# Altium PCB All-in-One.PcbDoc
Units mil, origin at the board's own origin, x right, y up, seen from the top; angles counter-clockwise.
Board outline 5050 x 8260 mil, 2 copper layers (Top Layer, Bottom Layer); 48 components, 29 nets, 108 pads, 0 vias.
Unrouted connection lines stored in the file: 35.
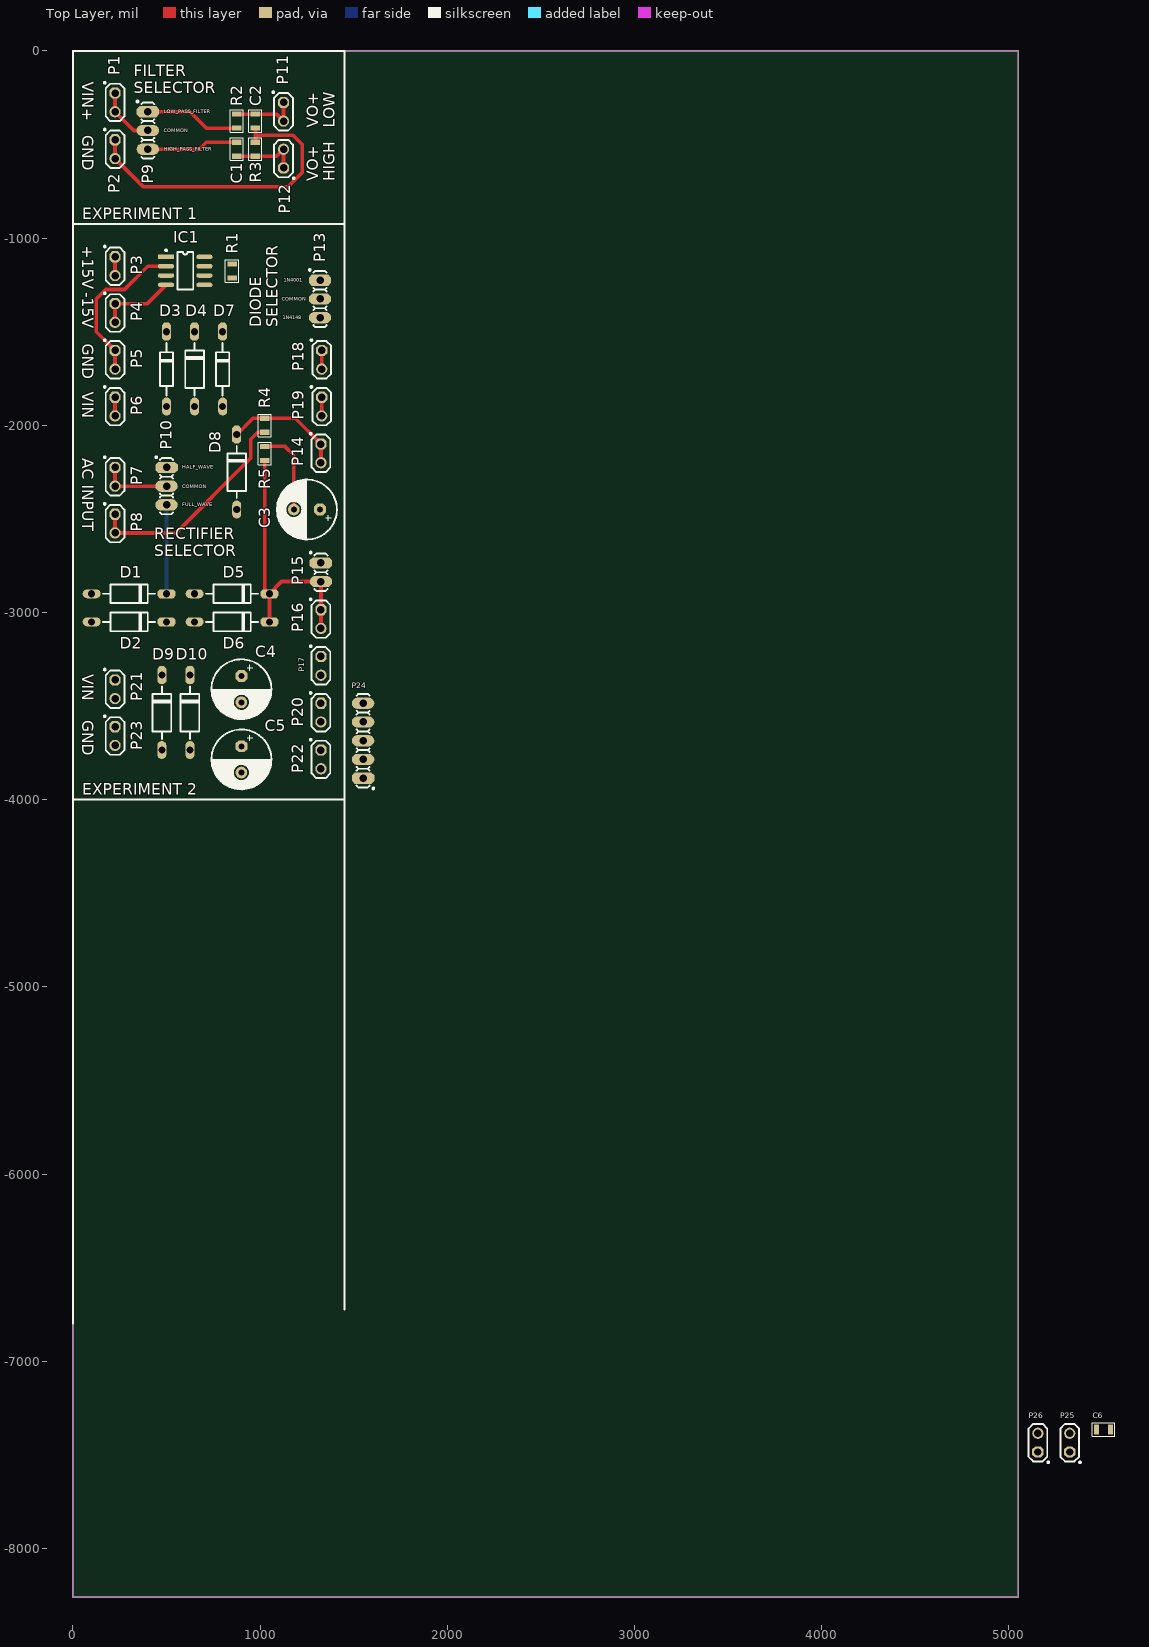
[diagram p0: Top Layer view]
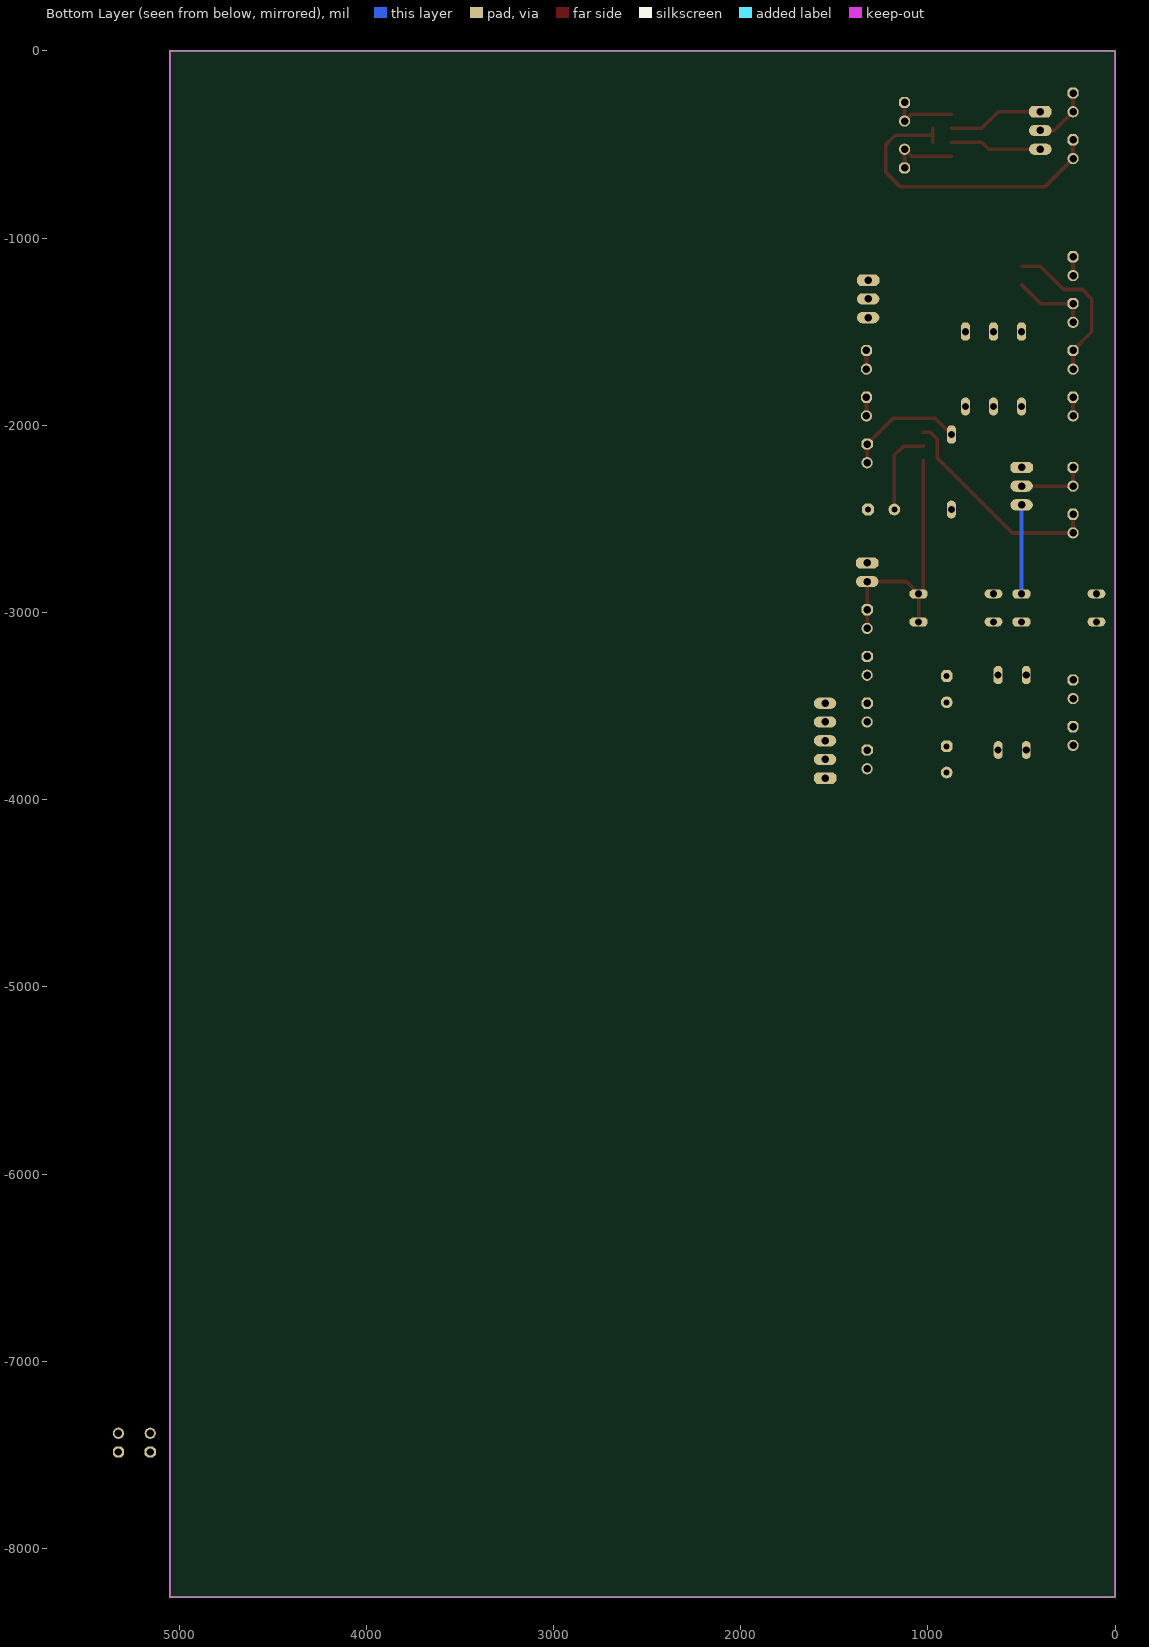
[diagram p1: Bottom Layer view, seen from below]

## Layer stack, top to bottom
Top Solder: solder mask 0.4, Solder Resist, Dk 3.5
Top Layer: signal copper 1.4
Dielectric 1: dielectric 12.6, FR-4, Dk 4.8
Bottom Layer: signal copper 1.4
Bottom Solder: solder mask 0.4, Solder Resist, Dk 3.5

## Board outline
0,-8260 0,0 5050,0 5050,-8260

## Design rules (kind name [scope] priority, off if disabled: settings)
Clearance [All] p1: gap=10
PolygonConnect [All] p1: connectstyle=Relief reliefconductorwidth=10 reliefentries=4 polygonreliefangle="90 Angle" airgapwidth=10
RoutingVias [All] p1: holewidth=28 width=50 viastyle="Through Hole" minholewidth=28 minwidth=50 maxholewidth=28 maxwidth=50
SolderMaskExpansion [All] p1: expansion=4
Width [All] p1: maxlimit=30 minlimit=12 preferedwidth=20 minimp=50.000000 maximp=50.000000 favimp=50.000000
30 further rules are at their usual default settings.

## Classes and differential pairs
component class "Experiment 2": C3 C4 C5 D1 D2 D3 D4 D5 D6 D7 D8 D9 D10 IC1 P3 P4 P5 P6 P7 P8 P10 P13 P14 P15 P16 P17 P18 P19 P20 P21 P22 P23 P24 R1 R4 R5
component class "Experiment 1": C1 C2 P1 P2 P9 P11 P12 R2 R3
component class "Experiment 3": C6 P25 P26

## Components (designator, comment, footprint, x,y, rotation, side; value= is the part's Value field where it differs from the comment)
C1 "100pF" C0805 875,-525 r270 top (schematic designator C2)
C2 "100pF" C0805 975,-375 r270 top (schematic designator C1)
C3 "100uF/50V" C-3.5x8 1250,-2450 r180 top
C4 "100uF/50V" C-3.5x8 900,-3410 r270 top
C5 "100uF/50V" C-3.5x8 900,-3785 r270 top
C6 "1uF" C0805 5505,-7365 r0 top
D1 "1N4001" DO41-10 300,-2900 r0 top (schematic designator D5)
D2 "1N4001" DO41-10 300,-3050 r0 top (schematic designator D7)
D3 "1N4148" DO35-10 500,-1700 r90 top (schematic designator D1)
D4 "1N4001" DO41-10 650,-1700 r90 top (schematic designator D3)
D5 "1N4001" DO41-10 850,-2900 r0 top (schematic designator D6)
D6 "1N4001" DO41-10 850,-3050 r0 top (schematic designator D8)
D7 "1N4148" DO35-10 800,-1700 r90 top (schematic designator D2)
D8 "1N4001" DO41-10 875,-2250 r90 top (schematic designator D4)
D9 "1N4001" DO41-10 475,-3535 r90 top
D10 "1N4001" DO41-10 625,-3535 r90 top
IC1 "UA741CDT" SOIC-8 600,-1175 r0 top
P1 "VIN" "PINHD-1X02 ONCE" 225,-275 r270 top net-tie (schematic designator P2)
P2 "GND" "PINHD-1X02 ONCE" 225,-525 r270 top net-tie (schematic designator P4)
P3 "+15V" "PINHD-1X02 ONCE" 225,-1150 r270 top net-tie (schematic designator P7)
P4 "-15V" "PINHD-1X02 ONCE" 225,-1400 r270 top net-tie (schematic designator P9)
P5 "GND" "PINHD-1X02 ONCE" 225,-1650 r270 top net-tie (schematic designator P11)
P6 "VIN" "PINHD-1X02 ONCE" 225,-1900 r270 top net-tie
P7 "+AC" "PINHD-1X02 ONCE" 225,-2275 r270 top net-tie (schematic designator P16)
P8 "-AC" "PINHD-1X02 ONCE" 225,-2525 r270 top net-tie (schematic designator P17)
P9 "SEL_FILTER" PINHD-1X03 400,-425 r270 top (schematic designator P7)
P10 "SEL_RECTIF" PINHD-1X03 500,-2325 r270 top (schematic designator P13)
P11 "VO_LOW" "PINHD-1X02 ONCE" 1125,-325 r270 top net-tie (schematic designator P8)
P12 "VO_HIGH" "PINHD-1X02 ONCE" 1125,-575 r90 top net-tie (schematic designator P9)
P13 "SEL_DIODE" PINHD-1X03 1320,-1325 r270 top (schematic designator P10)
P14 "+AC" "PINHD-1X02 ONCE" 1325,-2150 r270 top net-tie (schematic designator P15)
P15 "ENABLE_CAPAC" PINHD-1X02 1325,-2785 r270 top (schematic designator P14)
P16 "VCC" "PINHD-1X02 ONCE" 1325,-3035 r270 top net-tie (schematic designator P18)
P17 "GND" "PINHD-1X02 ONCE" 1325,-3285 r270 top net-tie (schematic designator P19)
P18 "VR" "PINHD-1X02 ONCE" 1329,-1650 r270 top net-tie (schematic designator P11)
P19 "VD" "PINHD-1X02 ONCE" 1329,-1900 r270 top net-tie (schematic designator P12)
P20 "V+_D" "PINHD-1X02 ONCE" 1325,-3535 r270 top
P21 "VIN_D" "PINHD-1X02 ONCE" 225,-3410 r270 top
P22 "V-_D" "PINHD-1X02 ONCE" 1325,-3785 r270 top
P23 "GND_D" "PINHD-1X02 ONCE" 225,-3660 r270 top
P24 "NAME?" PINHD-1X05 1550,-3685 r90 top
P25 "VIN" "PINHD-1X02 ONCE" 5325,-7435 r90 top
P26 "GND" "PINHD-1X02 ONCE" 5155,-7435 r90 top
R1 "1k" R0805 850,-1175 r90 top (schematic designator R3)
R2 "100k" R0805 875,-375 r90 top (schematic designator R1)
R3 "100k" R0805 975,-525 r270 top (schematic designator R2)
R4 "10k" R0805 1025,-2000 r90 top
R5 "10k" R0805 1025,-2150 r270 top

## Footprints (in the part's own frame and the unit in brackets; to place one, negate y for a bottom-side part, rotate by r counter-clockwise, add the part's x,y. Pads: shape width x height; smd on the part's side, far side on the other; paste and mask are expansions set on the pad)
C0805 [mm]
  rect 0.7x1.3 smd: 1(-0.95,0) 2(0.95,0)
  silkscreen extent -1.52,-0.89 1.52,0.89, body extent -1,-0.6 1,0.6, height 0.95
C-3.5x8 [mil]
  oct 63x63 hole 32: 1(-70,0)
  round 63 hole 32: 2(70,0)
  silkscreen extent -160,-160 160,160, body extent -157,-157 158,157, height 453
DO35-10 [mil]
  oval 96x48 hole 38: A(-200,0)
  oct 96x48 hole 38: C(200,0)
  silkscreen extent -140,-40 140,40, body extent -211,-35 211,35, height 72
DO41-10 [mil]
  oval 96x48 hole 38: A(-200,0)
  oct 96x48 hole 38: C(200,0)
  silkscreen extent -140,-50 140,50, body extent -214,-54 214,54, height 132
PINHD-1X02 [mil]
  oct 60x120 hole 40: 1(-50,0)
  oval 60x120 hole 40: 2(50,0)
  silkscreen extent -110,-60 100,35, body extent -100,-50 100,50, height 257
"PINHD-1X02 ONCE" [mil]
  oct 60x60 hole 40: 1(-50,0)
  round 60 hole 40: 2(50,0)
  silkscreen extent -110,-60 100,50, body extent -100,-50 0,50, height 257
PINHD-1X03 [mil]
  oct 60x120 hole 40: 1(-100,0)
  oval 60x120 hole 40: 2(0,0) 3(100,0)
  silkscreen extent -160,-60 150,35, body extent -150,-50 150,50, height 257
PINHD-1X05 [mil]
  oct 60x120 hole 40: 1(-200,0)
  oval 60x120 hole 40: 2(-100,0) 3(0,0) 4(100,0) 5(200,0)
  silkscreen extent -260,-60 250,35, body extent -250,-50 250,50, height 257
R0805 [mm]
  rect 0.7x1.3 smd: 1(-0.95,0) 2(0.95,0)
  silkscreen extent -1.52,-0.89 1.52,0.89, body extent -1,-0.63 1,0.63, height 0.47
SOIC-8 [mm]
  rect 2.2x0.6 smd: 1(-2.6,1.905)
  oval 2.2x0.6 smd: 2(-2.6,0.635) 3(-2.6,-0.635) 4(-2.6,-1.905) 5(2.6,-1.905) 6(2.6,-0.635) 7(2.6,0.635) 8(2.6,1.905)
  silkscreen extent -2.73,-2.54 1.08,2.92, body extent -3,-2.45 3,2.45, height 1.7

## Part data
C1 C2: library part CC0805JRNPO9BN101, "CAP CER 100PF 50V NPO 0805"
C3 C4 C5: library part UVR1H101MPD, "CAP ALUM 100UF 20% 50V RADIAL"
C6: library part CC0805ZKY5V9BB105, "CAP CER 1UF 50V Y5V 0805"
D1 D2 D4 D5 D6 D8 D9 D10: "DIODE GEN PURP 50V 1A DO41"
D3 D7: "DIODE GEN PURP 100V 200MA DO35"
IC1: "IC OPAMP GP 1MHZ 8SO"
P1 P2 P3 P4 P5 P6 P7 P8 P11 P12 P14 P16 P17 P18 P19 P20 P21 P22 P23 P25 P26: library part "PIN HEADER 1X02 ONCE", "CONN HEADER 2POS .100\" STR TIN"
P9 P10 P13: library part "PIN HEADER 1X03", "CONN HEADER 3POS .100\" STR TIN"
P15: library part "PIN HEADER 1X02", "CONN HEADER 2POS .100\" STR TIN"
P24: library part "PIN HEADER 1X05", "CONN HEADER 5POS .100\" STR TIN"
R1: library part ERJ-6ENF1001V, "RES SMD 1K OHM 1% 1/8W 0805"
R2 R3: library part ERJ-6ENF1003V, "RES SMD 100K OHM 1% 1/8W 0805"
R4 R5: library part ERJ-6ENF1002V, "RES SMD 10K OHM 1% 1/8W 0805"

## Nets (pads, with @x,y where several pads share a name; then routed paths per layer and width w, separated by ;. In a path a pad name is that pad's centre, name@x,y a point inside that pad or via, vN(x,y) a via of type N, cw(c..) or ccw(c..) an arc to the next point about the centre after c; other vN are vias at no path point)
+15V/2: IC1.7 P3.1 P3.2 | length 100
  Top Layer w20: P3.2 P3.1
+AC/2: P7.1 P7.2 P10.2 | length 375
  Top Layer w20: P7.1 P7.2 P10.2
-15V/2: IC1.4 P4.1 P4.2 | length 414.1
  Top Layer w20: P4.2 P4.1 397.64,-1350 IC1.4
-AC/2: D2.C D6.A P8.1 P8.2 R4.1 | length 1181.3
  Top Layer w20: P8.1 P8.2 550,-2575 950,-2175 950,-2075 987.6,-2037.4 R4.1
AGND/2: IC1.2 P5.1 P5.2 | length 861.5
  Top Layer w20: P5.2 P5.1 125,-1500 125,-1325 175,-1275 275,-1275 400,-1150 IC1.2
GND/1: C2.2 P2.1 P2.2 R3.1 | length 1689.1
  Top Layer w20: P2.1 P2.2 375,-725 1150,-725 1225,-650 1225,-500 1175,-450 975,-450 ; R3.1 975,-450 ; C2.2 975,-450
HIGH_PASS_FILTER: C1.1 P9.3 | length 490.5
  Top Layer w20: P9.3 675,-525 712.4,-487.6 C1.1
LOW_PASS_FILTER: P9.1 R2.1 | length 511.2
  Top Layer w20: P9.1 625,-325 712.4,-412.4 R2.1
NetC1_2: C1.2 P12.1 P12.2 R3.2 | length 365.5
  Top Layer w20: C1.2 R3.2 1087.6,-562.4 P12.2 P12.1
NetC2_1: C2.1 P11.1 P11.2 R2.2 | length 365.5
  Top Layer w20: R2.2 1087.6,-337.6 P11.2 P11.1
NetC3_1: C3.1 P15.1
NetC3_2: C3.2 D1.A D2.A P17.1 P17.2 R5.1 | length 464.6
  Top Layer w20: R5.1 1132.6,-2112.6 1180,-2160 C3.2
NetC4_1: C4.1 D9.C P20.1 P20.2
NetC4_2: C4.2 C5.1 P23.1 P23.2
NetC5_2: C5.2 D10.A P22.1 P22.2
NetC6_1: C6.1 P25.1 P25.2
NetD1_C: D1.C D5.A P10.3 | length 475
  Bottom Layer w20: D1.C P10.3
NetD3_C: D3.C P18.1 P18.2 R1.1 | length 100
  Top Layer w20: P18.2 P18.1
NetD4_A: D4.A P13.1
NetD4_C: D4.C D7.C IC1.6 P19.1 P19.2 | length 100
  Top Layer w20: P19.2 P19.1
NetD5_C: D5.C D6.C P15.2 P16.1 P16.2 R5.2 | length 1424.9
  Top Layer w20: R5.2 1025,-2875 D5.C ; D6.C D5.C ; P16.2 P16.1 P15.2 1115,-2835 D5.C
NetD7_A: D7.A P13.3
NetD8_A: D8.A P10.1
NetD8_C: D8.C P14.1 P14.2 R4.2 | length 643.1
  Top Layer w20: D8.C 962.4,-1962.6 R4.2 1187.6,-1962.6 P14.1 P14.2
NetD9_A: D9.A D10.C P21.1 P21.2
NetIC1_3: IC1.3 P13.2 R1.2
NetP26_1: P26.1 P26.2
VIN/1: P1.1 P1.2 P9.2 | length 316.4
  Top Layer w20: P1.1 P1.2 325,-425 P9.2
VIN/2: D3.A P6.1 P6.2 | length 100
  Top Layer w20: P6.2 P6.1
pads on no net: C6.2 IC1.1 IC1.5 IC1.8 P24.1 P24.2 P24.3 P24.4 P24.5

## Keep-outs
Keep-Out Layer:
  the board outline again, w10

## Silkscreen, mask and mechanical layers (free items; w line width, h text height)
Top Overlay:
  lines w10: 0,-6800 0,-4000 ; 1450,-6725 1450,-925 ; 1450,-4000 0,-4000 ; 0,-4000 0,-925 ; 0,-925 0,0 1450,0 1450,-925 ; 0,-925 1450,-925
  text "VIN+" at 50,-165.03 h60 r270
  text "FILTER / SELECTOR" at 325,-225 h60
  text "LOW_PASS_FILTER" at 485,-333.33 h20
  text "VO+ / LOW" at 1400,-409.97 h60 r90
  text "COMMON" at 485,-435 h20
  text "GND" at 50,-450.03 h60 r270
  text "HIGH_PASS_FILTER" at 485,-533.33 h20
  text "VO+ / HIGH" at 1400,-694.97 h60 r90
  text "EXPERIMENT 1" at 50,-900 h60
  text "+15V" at 50,-1040.03 h60 r270
  text "1N4001" at 1125,-1233.33 h20
  text "-15V" at 50,-1290.03 h60 r270
  text "COMMON" at 1115,-1335 h20
  text "1N4148" at 1121.66,-1433.33 h20
  text "DIODE / SELECTOR" at 1095,-1475 h60 r90
  text "GND" at 50,-1565.03 h60 r270
  text "VIN" at 50,-1820.02 h60 r270
  text "AC INPUT" at 50,-2175 h60 r270
  text "HALF_WAVE" at 585,-2233.33 h20
  text "COMMON" at 585,-2335 h20
  text "FULL_WAVE" at 585,-2433.33 h20
  text "RECTIFIER / SELECTOR" at 435,-2700 h60
  text "VIN" at 50,-3330.02 h60 r270
  text "GND" at 50,-3575.03 h60 r270
  text "EXPERIMENT 2" at 50,-3975 h60